# EAGLE board Sound_MP3-TF-16P_9x (EAGLE 9.5.2), part 1 of 2
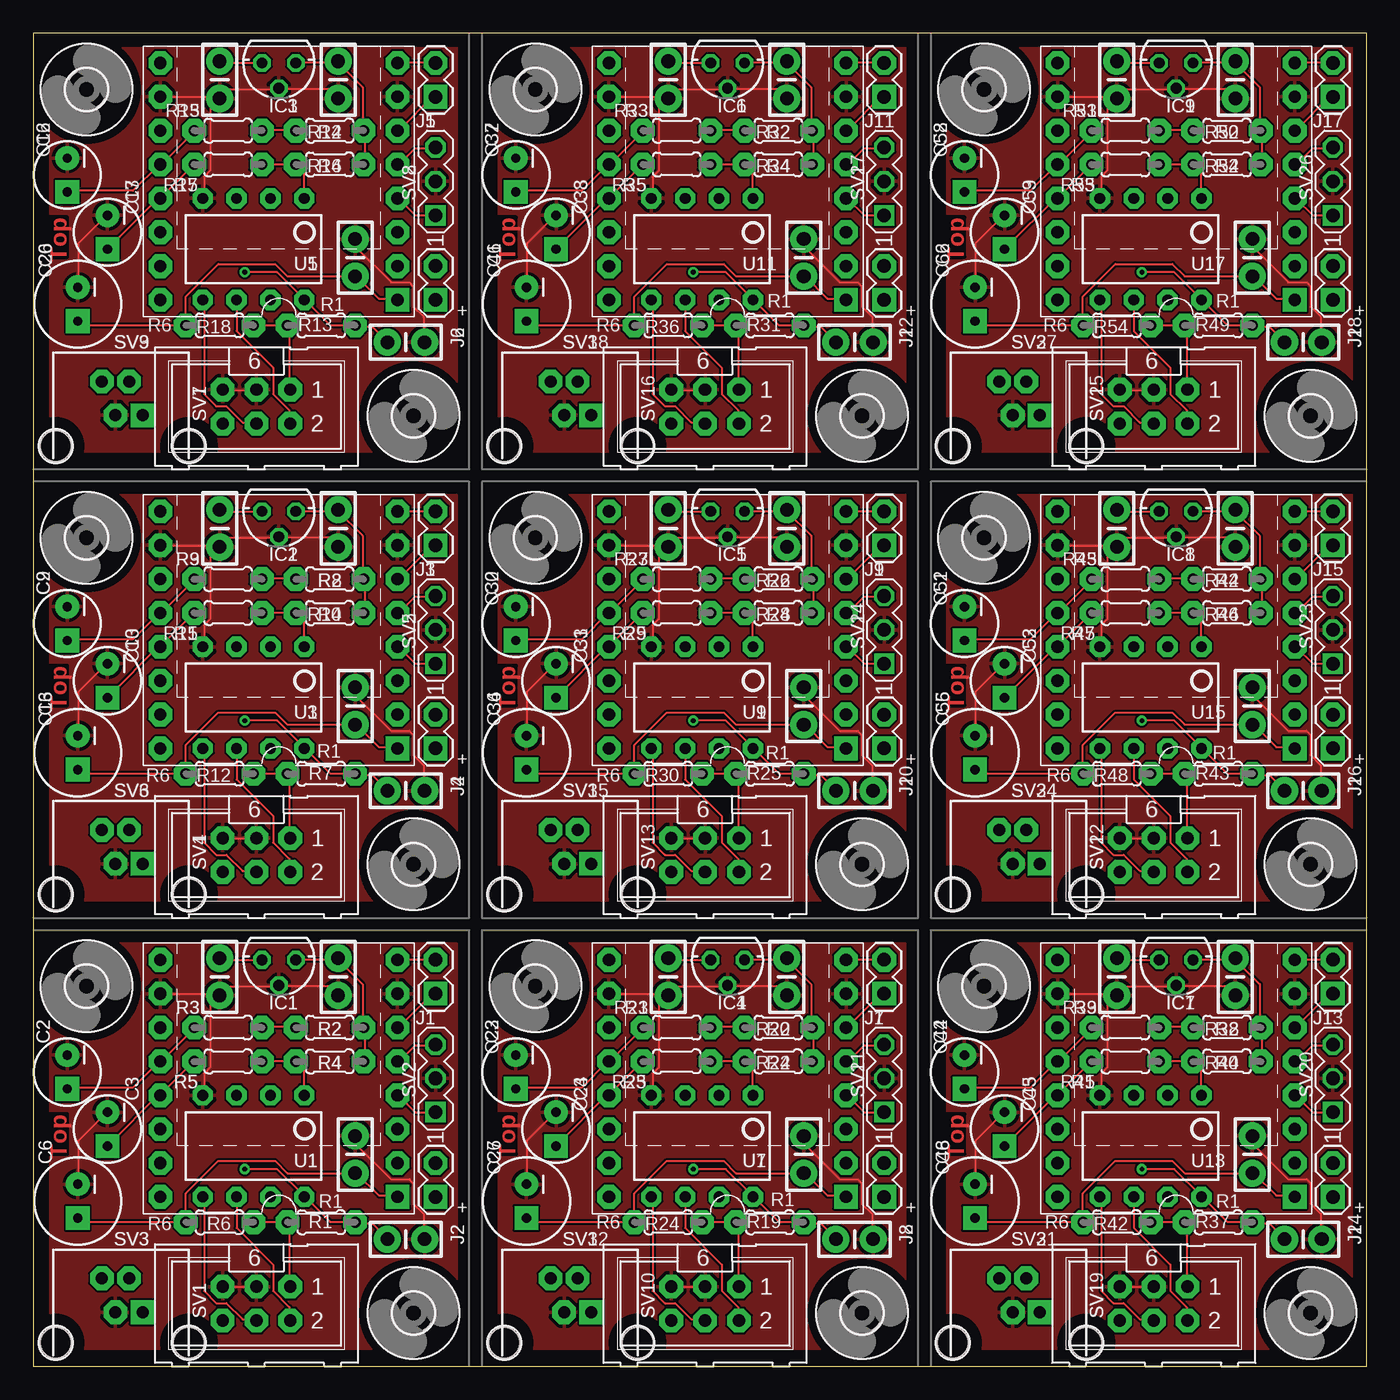
[diagram p0: board, top side]
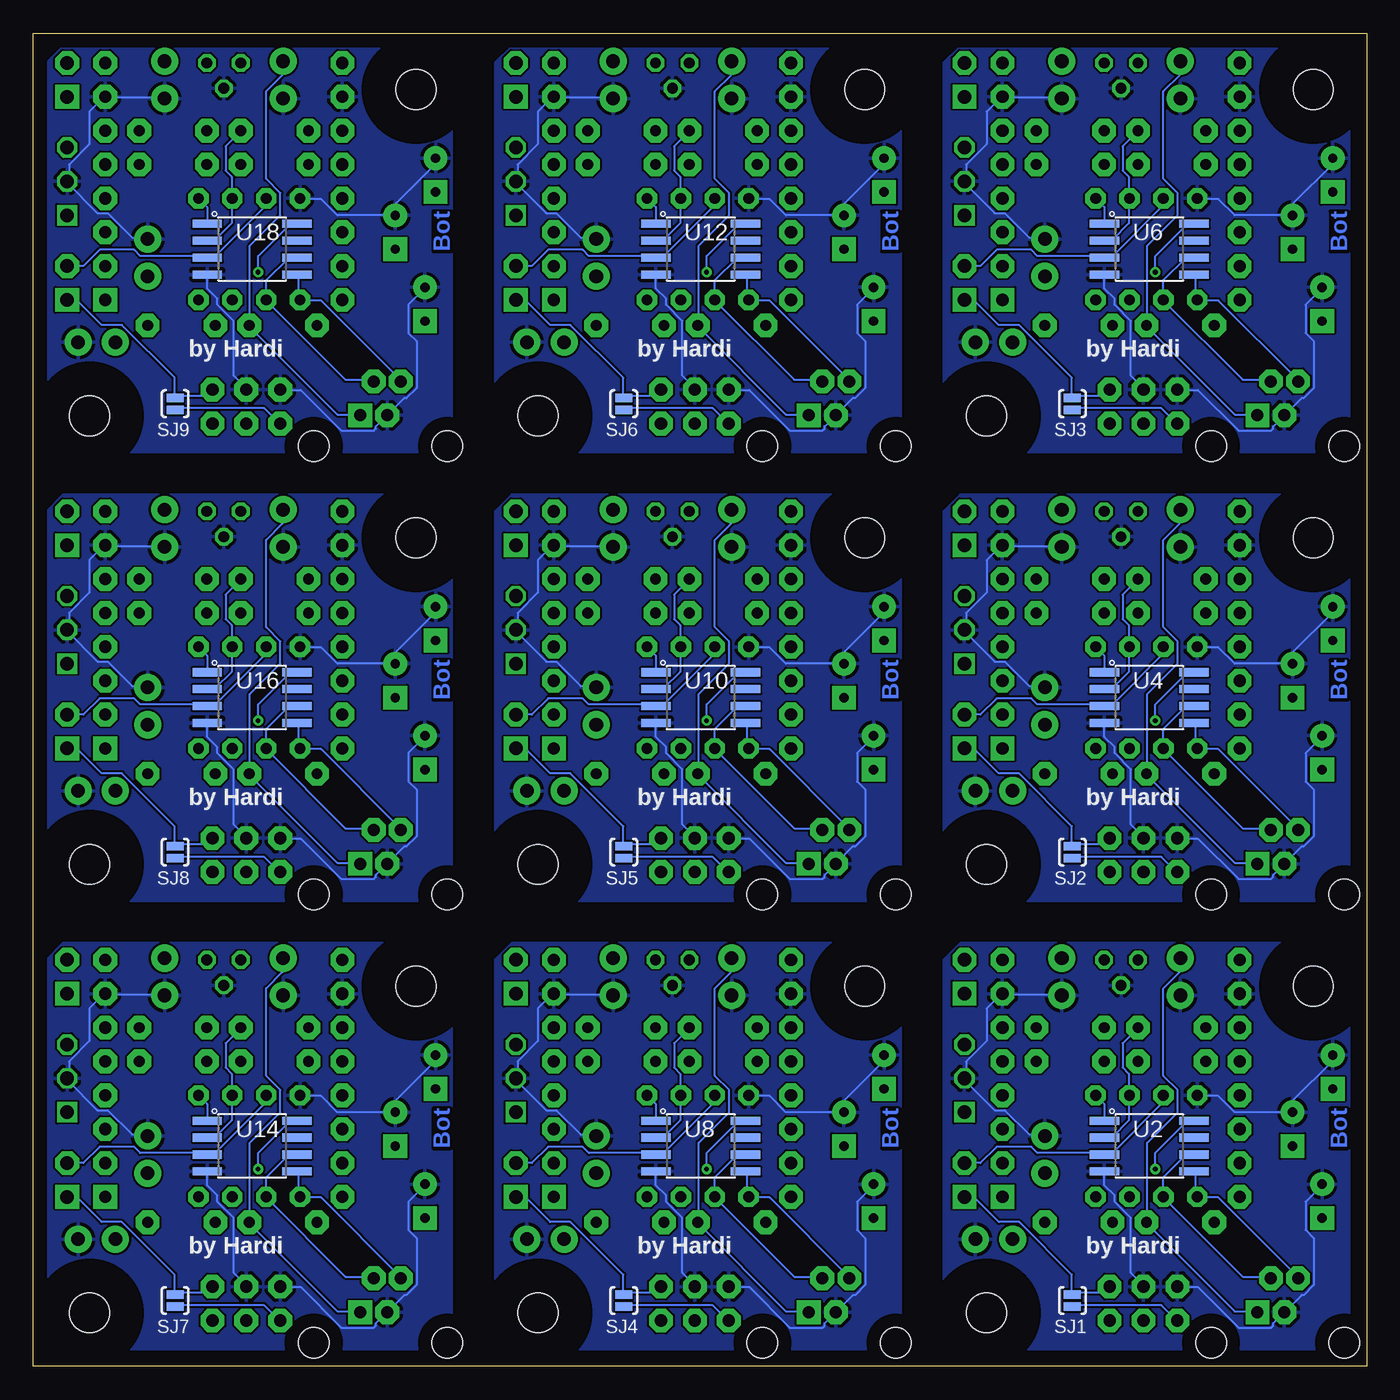
[diagram p1: board, bottom side, seen from below]

Size 99.98 x 99.98 mm. Coordinates in mm from the lower left corner, seen from the top.
Outline: 0,66.34 0,33.64
Outline: 33.64,0 66.34,0
Outline: 66.34,99.98 33.64,99.98
Outline: 99.98,33.64 99.98,66.34
Outline: 0,0 99.98,0 99.98,99.98 0,99.98 0,0
Copper layers (1*16): Top 0.035mm / dielectric 1.5mm / Bottom 0.035mm
Design rules "default": minimum track width 6mil, minimum drill 0.35mm, track to track 6mil, track to pad 6mil, pad to pad 6mil, via to via 6mil, smd to smd 6mil, copper to edge 40mil, drill to drill 6mil, minimum pad ring 10mil, minimum via ring 8mil, stop-mask expansion 4mil, vias tented up to drill 0mil, thermal gap 10mil

## Footprints (pad centres in the part's own frame; a part is rotated, then mirrored left to right if it is on the bottom)
CAP-PTH-SMALL-KIT = drill 1.016 pad 2.032: 1 -1.397,0; 2 1.397,0
CAPACITOR_CPOL-RADIAL-22UF = drill 0.7 pad 1.778 square: 1 1.27,0 | drill 0.7 pad 1.778: 2 -1.27,0
SPARKFUN-CAPACITORS_CPOL-RADIAL-100UF-25V = drill 0.7 pad 1.778 square: 1 1.27,0 | drill 0.7 pad 1.778: 2 -1.27,0
3,0 = hole 3: 0,0
78LXX = drill 0.813 octagon: GND 0,1.905; IN 1.27,0; OUT -1.27,0
1X02 = drill 1.016 pad 1.778 square: 1 0,0 | drill 1.016 pad 1.778 octagon: 2 2.54,0
MP3-TF-16P_MP3-TF-16P = drill 0.914 pad 1.778 square: 1 -8.89,16.51 | drill 0.914 pad 1.778 octagon: 2 -8.89,13.97; 3 -8.89,11.43; 4 -8.89,8.89; 5 -8.89,6.35; 6 -8.89,3.81; 7 -8.89,1.27; 8 -8.89,-1.27; 9 8.89,-1.27; 10 8.89,1.27; 11 8.89,3.81; 12 8.89,6.35; 13 8.89,8.89; 14 8.89,11.43; 15 8.89,13.97; 16 8.89,16.51
RCL_0204/5 = drill 0.813 pad 1.778 octagon: 1 -2.54,0; 2 2.54,0
SJ_2S-NO = smd 0.635 x 1.27: 1 -0.45,0; 2 0.45,0
ML6 = drill 0.914 pad 1.778 octagon: 1 -2.54,-1.27; 2 -2.54,1.27; 3 0,-1.27; 4 0,1.27; 5 2.54,-1.27; 6 2.54,1.27
MA03-1 = drill 1.016 pad 1.524 square: 1 -3.81,0 | drill 1.016 pad 1.524 octagon: 2 -1.27,0; 3 1.27,0
RJ10_NO_OVERLAP_BORDER = drill 0.9 pad 1.778 square: 1 -1.524,-2.3 | drill 0.9 pad 1.778 octagon: 2 -0.508,-4.84; 3 0.508,-2.3; 4 1.524,-4.84 | hole 2.3: 5,0; -5,0
S3PO_MODUL_WS2811_SOUND_MP3-TF-16P_WS2811_AND_ATTINY_WS2811_DIP08 = drill 0.813 pad 1.524 octagon: 1 -3.81,-3.81; 2 -1.27,-3.81; 3 1.27,-3.81; 4 3.81,-3.81; 5 3.81,3.81; 6 1.27,3.81; 7 -1.27,3.81; 8 -3.81,3.81
S3PO_MODUL_WS2811_SOUND_MP3-TF-16P_WS2811_AND_ATTINY_WS2811_SO08-EIAJ = smd 0.61 x 2.21: 1 -1.905,-3.378; 2 -0.635,-3.378; 3 0.635,-3.378; 4 1.905,-3.378; 5 1.905,3.353; 6 0.635,3.353; 7 -0.635,3.353; 8 -1.905,3.353

## Placement (x,y rotation side)
C1  100nF  [CAP-PTH-SMALL-KIT]  27.94,9.52 0 top
C2  22uF  [CAPACITOR_CPOL-RADIAL-22UF]  2.54,22.07 270 top
C3  22uF  [CAPACITOR_CPOL-RADIAL-22UF]  5.56,17.78 270 top
C4  100nF  [CAP-PTH-SMALL-KIT]  22.86,29.21 270 top
C5  100nF  [CAP-PTH-SMALL-KIT]  13.97,29.21 270 top
C6  470uF  [SPARKFUN-CAPACITORS_CPOL-RADIAL-100UF-25V]  3.33,12.38 270 top
C7  100nF  [CAP-PTH-SMALL-KIT]  24.13,15.88 90 top
C8  100nF  [CAP-PTH-SMALL-KIT]  27.94,43.17 0 top
C9  22uF  [CAPACITOR_CPOL-RADIAL-22UF]  2.54,55.71 270 top
C10  22uF  [CAPACITOR_CPOL-RADIAL-22UF]  5.56,51.42 270 top
C11  100nF  [CAP-PTH-SMALL-KIT]  22.86,62.85 270 top
C12  100nF  [CAP-PTH-SMALL-KIT]  13.97,62.85 270 top
C13  470uF  [SPARKFUN-CAPACITORS_CPOL-RADIAL-100UF-25V]  3.33,46.02 270 top
C14  100nF  [CAP-PTH-SMALL-KIT]  24.13,49.52 90 top
C15  100nF  [CAP-PTH-SMALL-KIT]  27.94,76.81 0 top
C16  22uF  [CAPACITOR_CPOL-RADIAL-22UF]  2.54,89.35 270 top
C17  22uF  [CAPACITOR_CPOL-RADIAL-22UF]  5.56,85.06 270 top
C18  100nF  [CAP-PTH-SMALL-KIT]  22.86,96.49 270 top
C19  100nF  [CAP-PTH-SMALL-KIT]  13.97,96.49 270 top
C20  470uF  [SPARKFUN-CAPACITORS_CPOL-RADIAL-100UF-25V]  3.33,79.67 270 top
C21  100nF  [CAP-PTH-SMALL-KIT]  24.13,83.16 90 top
C22  100nF  [CAP-PTH-SMALL-KIT]  61.58,9.52 0 top
C23  22uF  [CAPACITOR_CPOL-RADIAL-22UF]  36.18,22.07 270 top
C24  22uF  [CAPACITOR_CPOL-RADIAL-22UF]  39.2,17.78 270 top
C25  100nF  [CAP-PTH-SMALL-KIT]  56.5,29.21 270 top
C26  100nF  [CAP-PTH-SMALL-KIT]  47.61,29.21 270 top
C27  470uF  [SPARKFUN-CAPACITORS_CPOL-RADIAL-100UF-25V]  36.97,12.38 270 top
C28  100nF  [CAP-PTH-SMALL-KIT]  57.77,15.88 90 top
C29  100nF  [CAP-PTH-SMALL-KIT]  61.58,43.17 0 top
C30  22uF  [CAPACITOR_CPOL-RADIAL-22UF]  36.18,55.71 270 top
C31  22uF  [CAPACITOR_CPOL-RADIAL-22UF]  39.2,51.42 270 top
C32  100nF  [CAP-PTH-SMALL-KIT]  56.5,62.85 270 top
C33  100nF  [CAP-PTH-SMALL-KIT]  47.61,62.85 270 top
C34  470uF  [SPARKFUN-CAPACITORS_CPOL-RADIAL-100UF-25V]  36.97,46.02 270 top
C35  100nF  [CAP-PTH-SMALL-KIT]  57.77,49.52 90 top
C36  100nF  [CAP-PTH-SMALL-KIT]  61.58,76.81 0 top
C37  22uF  [CAPACITOR_CPOL-RADIAL-22UF]  36.18,89.35 270 top
C38  22uF  [CAPACITOR_CPOL-RADIAL-22UF]  39.2,85.06 270 top
C39  100nF  [CAP-PTH-SMALL-KIT]  56.5,96.49 270 top
C40  100nF  [CAP-PTH-SMALL-KIT]  47.61,96.49 270 top
C41  470uF  [SPARKFUN-CAPACITORS_CPOL-RADIAL-100UF-25V]  36.97,79.67 270 top
C42  100nF  [CAP-PTH-SMALL-KIT]  57.77,83.16 90 top
C43  100nF  [CAP-PTH-SMALL-KIT]  95.22,9.52 0 top
C44  22uF  [CAPACITOR_CPOL-RADIAL-22UF]  69.82,22.07 270 top
C45  22uF  [CAPACITOR_CPOL-RADIAL-22UF]  72.84,17.78 270 top
C46  100nF  [CAP-PTH-SMALL-KIT]  90.14,29.21 270 top
C47  100nF  [CAP-PTH-SMALL-KIT]  81.25,29.21 270 top
C48  470uF  [SPARKFUN-CAPACITORS_CPOL-RADIAL-100UF-25V]  70.61,12.38 270 top
C49  100nF  [CAP-PTH-SMALL-KIT]  91.41,15.88 90 top
C50  100nF  [CAP-PTH-SMALL-KIT]  95.22,43.17 0 top
C51  22uF  [CAPACITOR_CPOL-RADIAL-22UF]  69.82,55.71 270 top
C52  22uF  [CAPACITOR_CPOL-RADIAL-22UF]  72.84,51.42 270 top
C53  100nF  [CAP-PTH-SMALL-KIT]  90.14,62.85 270 top
C54  100nF  [CAP-PTH-SMALL-KIT]  81.25,62.85 270 top
C55  470uF  [SPARKFUN-CAPACITORS_CPOL-RADIAL-100UF-25V]  70.61,46.02 270 top
C56  100nF  [CAP-PTH-SMALL-KIT]  91.41,49.52 90 top
C57  100nF  [CAP-PTH-SMALL-KIT]  95.22,76.81 0 top
C58  22uF  [CAPACITOR_CPOL-RADIAL-22UF]  69.82,89.35 270 top
C59  22uF  [CAPACITOR_CPOL-RADIAL-22UF]  72.84,85.06 270 top
C60  100nF  [CAP-PTH-SMALL-KIT]  90.14,96.49 270 top
C61  100nF  [CAP-PTH-SMALL-KIT]  81.25,96.49 270 top
C62  470uF  [SPARKFUN-CAPACITORS_CPOL-RADIAL-100UF-25V]  70.61,79.67 270 top
C63  100nF  [CAP-PTH-SMALL-KIT]  91.41,83.16 90 top
H1  MOUNT-HOLE3.0  [3,0]  4,28.5 0 top
H2  MOUNT-HOLE3.0  [3,0]  4,62.14 0 top
H3  MOUNT-HOLE3.0  [3,0]  28.5,4 0 top
H4  MOUNT-HOLE3.0  [3,0]  28.5,37.64 0 top
H5  MOUNT-HOLE3.0  [3,0]  4,95.78 0 top
H6  MOUNT-HOLE3.0  [3,0]  28.5,71.28 0 top
H7  MOUNT-HOLE3.0  [3,0]  37.64,28.5 0 top
H8  MOUNT-HOLE3.0  [3,0]  62.14,4 0 top
H9  MOUNT-HOLE3.0  [3,0]  37.64,62.14 0 top
H10  MOUNT-HOLE3.0  [3,0]  62.14,37.64 0 top
H11  MOUNT-HOLE3.0  [3,0]  37.64,95.78 0 top
H12  MOUNT-HOLE3.0  [3,0]  62.14,71.28 0 top
H13  MOUNT-HOLE3.0  [3,0]  71.28,28.5 0 top
H14  MOUNT-HOLE3.0  [3,0]  95.78,4 0 top
H15  MOUNT-HOLE3.0  [3,0]  71.28,62.14 0 top
H16  MOUNT-HOLE3.0  [3,0]  95.78,37.64 0 top
H17  MOUNT-HOLE3.0  [3,0]  71.28,95.78 0 top
H18  MOUNT-HOLE3.0  [3,0]  95.78,71.28 0 top
IC1  LP 2950 ACZ3.3  [78LXX]  18.41,30.48 180 top
IC2  LP 2950 ACZ3.3  [78LXX]  18.41,64.12 180 top
IC3  LP 2950 ACZ3.3  [78LXX]  18.41,97.76 180 top
IC4  LP 2950 ACZ3.3  [78LXX]  52.05,30.48 180 top
IC5  LP 2950 ACZ3.3  [78LXX]  52.05,64.12 180 top
IC6  LP 2950 ACZ3.3  [78LXX]  52.05,97.76 180 top
IC7  LP 2950 ACZ3.3  [78LXX]  85.69,30.48 180 top
IC8  LP 2950 ACZ3.3  [78LXX]  85.69,64.12 180 top
IC9  LP 2950 ACZ3.3  [78LXX]  85.69,97.76 180 top
J1  Speaker  [1X02]  30.16,27.94 90 top
J2  LED  [1X02]  30.16,12.7 90 top
J3  Speaker  [1X02]  30.16,61.58 90 top
J4  LED  [1X02]  30.16,46.34 90 top
J5  Speaker  [1X02]  30.16,95.22 90 top
J6  LED  [1X02]  30.16,79.98 90 top
J7  Speaker  [1X02]  63.8,27.94 90 top
J8  LED  [1X02]  63.8,12.7 90 top
J9  Speaker  [1X02]  63.8,61.58 90 top
J10  LED  [1X02]  63.8,46.34 90 top
J11  Speaker  [1X02]  63.8,95.22 90 top
J12  LED  [1X02]  63.8,79.98 90 top
J13  Speaker  [1X02]  97.44,27.94 90 top
J14  LED  [1X02]  97.44,12.7 90 top
J15  Speaker  [1X02]  97.44,61.58 90 top
J16  LED  [1X02]  97.44,46.34 90 top
J17  Speaker  [1X02]  97.44,95.22 90 top
J18  LED  [1X02]  97.44,79.98 90 top
MOD1  Sound Modul  [MP3-TF-16P_MP3-TF-16P]  18.41,29.21 180 top
MOD2  Sound Modul  [MP3-TF-16P_MP3-TF-16P]  18.41,62.85 180 top
MOD3  Sound Modul  [MP3-TF-16P_MP3-TF-16P]  18.41,96.49 180 top
MOD4  Sound Modul  [MP3-TF-16P_MP3-TF-16P]  52.05,29.21 180 top
MOD5  Sound Modul  [MP3-TF-16P_MP3-TF-16P]  52.05,62.85 180 top
MOD6  Sound Modul  [MP3-TF-16P_MP3-TF-16P]  52.05,96.49 180 top
MOD7  Sound Modul  [MP3-TF-16P_MP3-TF-16P]  85.69,29.21 180 top
MOD8  Sound Modul  [MP3-TF-16P_MP3-TF-16P]  85.69,62.85 180 top
MOD9  Sound Modul  [MP3-TF-16P_MP3-TF-16P]  85.69,96.49 180 top
R1  150  [RCL_0204/5]  21.59,10.8 180 top
R2  1K5 1%  [RCL_0204/5]  22.23,25.4 180 top
R3  33  [RCL_0204/5]  14.61,25.4 180 top
R4  1K5 1%  [RCL_0204/5]  22.23,22.86 180 top
R5  33  [RCL_0204/5]  14.61,22.86 180 top
R6  1 R  [RCL_0204/5]  13.97,10.8 180 top
R7  150  [RCL_0204/5]  21.59,44.44 180 top
R8  1K5 1%  [RCL_0204/5]  22.23,59.04 180 top
R9  33  [RCL_0204/5]  14.61,59.04 180 top
R10  1K5 1%  [RCL_0204/5]  22.23,56.5 180 top
R11  33  [RCL_0204/5]  14.61,56.5 180 top
R12  1 R  [RCL_0204/5]  13.97,44.44 180 top
R13  150  [RCL_0204/5]  21.59,78.08 180 top
R14  1K5 1%  [RCL_0204/5]  22.23,92.68 180 top
R15  33  [RCL_0204/5]  14.61,92.68 180 top
R16  1K5 1%  [RCL_0204/5]  22.23,90.14 180 top
R17  33  [RCL_0204/5]  14.61,90.14 180 top
R18  1 R  [RCL_0204/5]  13.97,78.08 180 top
R19  150  [RCL_0204/5]  55.23,10.8 180 top
R20  1K5 1%  [RCL_0204/5]  55.86,25.4 180 top
R21  33  [RCL_0204/5]  48.24,25.4 180 top
R22  1K5 1%  [RCL_0204/5]  55.86,22.86 180 top
R23  33  [RCL_0204/5]  48.24,22.86 180 top
R24  1 R  [RCL_0204/5]  47.61,10.8 180 top
R25  150  [RCL_0204/5]  55.23,44.44 180 top
R26  1K5 1%  [RCL_0204/5]  55.86,59.04 180 top
R27  33  [RCL_0204/5]  48.24,59.04 180 top
R28  1K5 1%  [RCL_0204/5]  55.86,56.5 180 top
R29  33  [RCL_0204/5]  48.24,56.5 180 top
R30  1 R  [RCL_0204/5]  47.61,44.44 180 top
R31  150  [RCL_0204/5]  55.23,78.08 180 top
R32  1K5 1%  [RCL_0204/5]  55.86,92.68 180 top
R33  33  [RCL_0204/5]  48.24,92.68 180 top
R34  1K5 1%  [RCL_0204/5]  55.86,90.14 180 top
R35  33  [RCL_0204/5]  48.24,90.14 180 top
R36  1 R  [RCL_0204/5]  47.61,78.08 180 top
R37  150  [RCL_0204/5]  88.87,10.8 180 top
R38  1K5 1%  [RCL_0204/5]  89.5,25.4 180 top
R39  33  [RCL_0204/5]  81.88,25.4 180 top
R40  1K5 1%  [RCL_0204/5]  89.5,22.86 180 top
R41  33  [RCL_0204/5]  81.88,22.86 180 top
R42  1 R  [RCL_0204/5]  81.25,10.8 180 top
R43  150  [RCL_0204/5]  88.87,44.44 180 top
R44  1K5 1%  [RCL_0204/5]  89.5,59.04 180 top
R45  33  [RCL_0204/5]  81.88,59.04 180 top
R46  1K5 1%  [RCL_0204/5]  89.5,56.5 180 top
R47  33  [RCL_0204/5]  81.88,56.5 180 top
R48  1 R  [RCL_0204/5]  81.25,44.44 180 top
R49  150  [RCL_0204/5]  88.87,78.08 180 top
R50  1K5 1%  [RCL_0204/5]  89.5,92.68 180 top
R51  33  [RCL_0204/5]  81.88,92.68 180 top
R52  1K5 1%  [RCL_0204/5]  89.5,90.14 180 top
R53  33  [RCL_0204/5]  81.88,90.14 180 top
R54  1 R  [RCL_0204/5]  81.25,78.08 180 top
SJ1  Pin6 = 5V  [SJ_2S-NO]  22.07,4.92 270 bottom
SJ2  Pin6 = 5V  [SJ_2S-NO]  22.07,38.56 270 bottom
SJ3  Pin6 = 5V  [SJ_2S-NO]  22.07,72.2 270 bottom
SJ4  Pin6 = 5V  [SJ_2S-NO]  55.71,4.92 270 bottom
SJ5  Pin6 = 5V  [SJ_2S-NO]  55.71,38.56 270 bottom
SJ6  Pin6 = 5V  [SJ_2S-NO]  55.71,72.2 270 bottom
SJ7  Pin6 = 5V  [SJ_2S-NO]  89.35,4.92 270 bottom
SJ8  Pin6 = 5V  [SJ_2S-NO]  89.35,38.56 270 bottom
SJ9  Pin6 = 5V  [SJ_2S-NO]  89.35,72.2 270 bottom
SV1  [ML6]  16.73,4.7 180 top
SV2  Aux Out  [MA03-1]  30.16,22.86 90 top
SV3  RJ10RJ10_WO_OVERLAP  [RJ10_NO_OVERLAP_BORDER]  6.67,1.75 180 top
SV4  [ML6]  16.73,38.34 180 top
SV5  Aux Out  [MA03-1]  30.16,56.5 90 top
SV6  RJ10RJ10_WO_OVERLAP  [RJ10_NO_OVERLAP_BORDER]  6.67,35.39 180 top
SV7  [ML6]  16.73,71.98 180 top
SV8  Aux Out  [MA03-1]  30.16,90.14 90 top
SV9  RJ10RJ10_WO_OVERLAP  [RJ10_NO_OVERLAP_BORDER]  6.67,69.03 180 top
SV10  [ML6]  50.37,4.7 180 top
SV11  Aux Out  [MA03-1]  63.8,22.86 90 top
SV12  RJ10RJ10_WO_OVERLAP  [RJ10_NO_OVERLAP_BORDER]  40.31,1.75 180 top
SV13  [ML6]  50.37,38.34 180 top
SV14  Aux Out  [MA03-1]  63.8,56.5 90 top
SV15  RJ10RJ10_WO_OVERLAP  [RJ10_NO_OVERLAP_BORDER]  40.31,35.39 180 top
SV16  [ML6]  50.37,71.98 180 top
SV17  Aux Out  [MA03-1]  63.8,90.14 90 top
SV18  RJ10RJ10_WO_OVERLAP  [RJ10_NO_OVERLAP_BORDER]  40.31,69.03 180 top
SV19  [ML6]  84.01,4.7 180 top
SV20  Aux Out  [MA03-1]  97.44,22.86 90 top
SV21  RJ10RJ10_WO_OVERLAP  [RJ10_NO_OVERLAP_BORDER]  73.95,1.75 180 top
SV22  [ML6]  84.01,38.34 180 top
SV23  Aux Out  [MA03-1]  97.44,56.5 90 top
SV24  RJ10RJ10_WO_OVERLAP  [RJ10_NO_OVERLAP_BORDER]  73.95,35.39 180 top
SV25  [ML6]  84.01,71.98 180 top
SV26  Aux Out  [MA03-1]  97.44,90.14 90 top
SV27  RJ10RJ10_WO_OVERLAP  [RJ10_NO_OVERLAP_BORDER]  73.95,69.03 180 top
U1  WS2811-DIP  [S3PO_MODUL_WS2811_SOUND_MP3-TF-16P_WS2811_AND_ATTINY_WS2811_DIP08]  16.51,16.51 180 top
U2  WS2811-SMD  [S3PO_MODUL_WS2811_SOUND_MP3-TF-16P_WS2811_AND_ATTINY_WS2811_SO08-EIAJ]  16.28,16.51 270 bottom
U3  WS2811-DIP  [S3PO_MODUL_WS2811_SOUND_MP3-TF-16P_WS2811_AND_ATTINY_WS2811_DIP08]  16.51,50.15 180 top
U4  WS2811-SMD  [S3PO_MODUL_WS2811_SOUND_MP3-TF-16P_WS2811_AND_ATTINY_WS2811_SO08-EIAJ]  16.28,50.15 270 bottom
U5  WS2811-DIP  [S3PO_MODUL_WS2811_SOUND_MP3-TF-16P_WS2811_AND_ATTINY_WS2811_DIP08]  16.51,83.79 180 top
U6  WS2811-SMD  [S3PO_MODUL_WS2811_SOUND_MP3-TF-16P_WS2811_AND_ATTINY_WS2811_SO08-EIAJ]  16.28,83.79 270 bottom
U7  WS2811-DIP  [S3PO_MODUL_WS2811_SOUND_MP3-TF-16P_WS2811_AND_ATTINY_WS2811_DIP08]  50.15,16.51 180 top
U8  WS2811-SMD  [S3PO_MODUL_WS2811_SOUND_MP3-TF-16P_WS2811_AND_ATTINY_WS2811_SO08-EIAJ]  49.92,16.51 270 bottom
U9  WS2811-DIP  [S3PO_MODUL_WS2811_SOUND_MP3-TF-16P_WS2811_AND_ATTINY_WS2811_DIP08]  50.15,50.15 180 top
U10  WS2811-SMD  [S3PO_MODUL_WS2811_SOUND_MP3-TF-16P_WS2811_AND_ATTINY_WS2811_SO08-EIAJ]  49.92,50.15 270 bottom
U11  WS2811-DIP  [S3PO_MODUL_WS2811_SOUND_MP3-TF-16P_WS2811_AND_ATTINY_WS2811_DIP08]  50.15,83.79 180 top
U12  WS2811-SMD  [S3PO_MODUL_WS2811_SOUND_MP3-TF-16P_WS2811_AND_ATTINY_WS2811_SO08-EIAJ]  49.92,83.79 270 bottom
U13  WS2811-DIP  [S3PO_MODUL_WS2811_SOUND_MP3-TF-16P_WS2811_AND_ATTINY_WS2811_DIP08]  83.79,16.51 180 top
U14  WS2811-SMD  [S3PO_MODUL_WS2811_SOUND_MP3-TF-16P_WS2811_AND_ATTINY_WS2811_SO08-EIAJ]  83.56,16.51 270 bottom
U15  WS2811-DIP  [S3PO_MODUL_WS2811_SOUND_MP3-TF-16P_WS2811_AND_ATTINY_WS2811_DIP08]  83.79,50.15 180 top
U16  WS2811-SMD  [S3PO_MODUL_WS2811_SOUND_MP3-TF-16P_WS2811_AND_ATTINY_WS2811_SO08-EIAJ]  83.56,50.15 270 bottom
U17  WS2811-DIP  [S3PO_MODUL_WS2811_SOUND_MP3-TF-16P_WS2811_AND_ATTINY_WS2811_DIP08]  83.79,83.79 180 top
U18  WS2811-SMD  [S3PO_MODUL_WS2811_SOUND_MP3-TF-16P_WS2811_AND_ATTINY_WS2811_SO08-EIAJ]  83.56,83.79 270 bottom

## Library data of the parts
C1 C4 C5 C7 C8 C11 C12 C14 C15 C18 C19 C21 C22 C25 C26 C28 C29 C32 C33 C35 C36 C39 C40 C42 C43 C46 C47 C49 C50 C53 C54 C56 C57 C60 C61 C63 = SparkFun-Capacitors; PROD_ID: CAP-08370
C2 C3 C9 C10 C16 C17 C23 C24 C30 C31 C37 C38 C44 C45 C51 C52 C58 C59 = Sound_MP3-TF-16P_WS2811_and_ATTiny; PROD_ID: CAP-08439
C6 C13 C20 C27 C34 C41 C48 C55 C62 = Sound_MP3-TF-16P_and_WS2811; PROD_ID: CAP-08439
H1-H18 = holes
IC1-IC9 = v-reg-3
J1-J18 = SparkFun-Connectors
MOD1-MOD9 = Sound_MP3-TF-16P_WS2811_and_ATTiny; OC_FARNELL: unknown; OC_NEWARK: unknown
R1-R54 = Sound_MP3-TF-16P_and_WS2811; SPICEPREFIX: R
SJ1-SJ9 = SparkFun-Retired
SV1 SV4 SV7 SV10 SV13 SV16 SV19 SV22 SV25 = con-harting-ml; OC_FARNELL: unknown; OC_NEWARK: unknown
SV2 SV5 SV8 SV11 SV14 SV17 SV20 SV23 SV26 = con-lstb
SV3 SV6 SV9 SV12 SV15 SV18 SV21 SV24 SV27 = RJ10
U1 U3 U5 U7 U9 U11 U13 U15 U17 = S3PO_Modul_WS2811; PROD_ID: IC-09439
U2 U4 U6 U8 U10 U12 U14 U16 U18 = S3PO_Modul_WS2811; PROD_ID: IC-08922; VALUE: Tiny45-20-SMT

## Nets
3V1: C11.1 IC2.OUT R8.1 R10.1
3V2: C18.1 IC3.OUT R14.1 R16.1
3V3: C4.1 IC1.OUT R2.1 R4.1
3V4: C25.1 IC4.OUT R20.1 R22.1
3V5: C32.1 IC5.OUT R26.1 R28.1
3V6: C39.1 IC6.OUT R32.1 R34.1
3V7: C46.1 IC7.OUT R38.1 R40.1
3V8: C53.1 IC8.OUT R44.1 R46.1
3V9: C60.1 IC9.OUT R50.1 R52.1
+5V: C5.1 IC1.IN J2.1 R1.2 R6.1 SJ1.1 SV1.1 SV3.1
+5V1: SJ1.2 SV1.6
+5V2: C12.1 IC2.IN J4.1 R7.2 R12.1 SJ2.1 SV4.1 SV6.1
+5V3: SJ2.2 SV4.6
+5V4: C19.1 IC3.IN J6.1 R13.2 R18.1 SJ3.1 SV7.1 SV9.1
+5V5: SJ3.2 SV7.6
+5V6: C26.1 IC4.IN J8.1 R19.2 R24.1 SJ4.1 SV10.1 SV12.1
+5V7: SJ4.2 SV10.6
+5V8: C33.1 IC5.IN J10.1 R25.2 R30.1 SJ5.1 SV13.1 SV15.1
+5V9: SJ5.2 SV13.6
+5V10: C40.1 IC6.IN J12.1 R31.2 R36.1 SJ6.1 SV16.1 SV18.1
+5V11: SJ6.2 SV16.6
+5V12: C47.1 IC7.IN J14.1 R37.2 R42.1 SJ7.1 SV19.1 SV21.1
+5V13: SJ7.2 SV19.6
+5V14: C54.1 IC8.IN J16.1 R43.2 R48.1 SJ8.1 SV22.1 SV24.1
+5V15: SJ8.2 SV22.6
+5V16: C61.1 IC9.IN J18.1 R49.2 R54.1 SJ9.1 SV25.1 SV27.1
+5V17: SJ9.2 SV25.6
G1: R4.2 R5.1 U1.1 U2.1
G2: R10.2 R11.1 U3.1 U4.1
G3: R16.2 R17.1 U5.1 U6.1
G4: R22.2 R23.1 U7.1 U8.1
G5: R28.2 R29.1 U9.1 U10.1
G6: R34.2 R35.1 U11.1 U12.1
G7: R40.2 R41.1 U13.1 U14.1
G8: R46.2 R47.1 U15.1 U16.1
G9: R52.2 R53.1 U17.1 U18.1
GND: C1.2 C2.2 C3.2 C4.2 C5.2 C6.2 C7.2 IC1.GND MOD1.7 MOD1.10 SV1.3 SV1.5 SV2.2 SV3.3 U1.4 U2.4
GND1: C8.2 C9.2 C10.2 C11.2 C12.2 C13.2 C14.2 IC2.GND MOD2.7 MOD2.10 SV4.3 SV4.5 SV5.2 SV6.3 U3.4 U4.4
GND2: C15.2 C16.2 C17.2 C18.2 C19.2 C20.2 C21.2 IC3.GND MOD3.7 MOD3.10 SV7.3 SV7.5 SV8.2 SV9.3 U5.4 U6.4
GND3: C22.2 C23.2 C24.2 C25.2 C26.2 C27.2 C28.2 IC4.GND MOD4.7 MOD4.10 SV10.3 SV10.5 SV11.2 SV12.3 U7.4 U8.4
GND4: C29.2 C30.2 C31.2 C32.2 C33.2 C34.2 C35.2 IC5.GND MOD5.7 MOD5.10 SV13.3 SV13.5 SV14.2 SV15.3 U9.4 U10.4
GND5: C36.2 C37.2 C38.2 C39.2 C40.2 C41.2 C42.2 IC6.GND MOD6.7 MOD6.10 SV16.3 SV16.5 SV17.2 SV18.3 U11.4 U12.4
GND6: C43.2 C44.2 C45.2 C46.2 C47.2 C48.2 C49.2 IC7.GND MOD7.7 MOD7.10 SV19.3 SV19.5 SV20.2 SV21.3 U13.4 U14.4
GND7: C50.2 C51.2 C52.2 C53.2 C54.2 C55.2 C56.2 IC8.GND MOD8.7 MOD8.10 SV22.3 SV22.5 SV23.2 SV24.3 U15.4 U16.4
GND8: C57.2 C58.2 C59.2 C60.2 C61.2 C62.2 C63.2 IC9.GND MOD9.7 MOD9.10 SV25.3 SV25.5 SV26.2 SV27.3 U17.4 U18.4
N$1: MOD1.5 SV2.3
N$2: MOD1.4 SV2.1
N$3: SV1.2 SV3.2 U1.6 U2.6
N$4: SV1.4 SV3.4 U1.5 U2.5
N$5: J1.1 MOD1.6
N$6: J1.2 MOD1.8
N$7: C2.1 MOD1.12 R3.2
N$8: C3.1 MOD1.13 R5.2
N$9: C6.1 C7.1 MOD1.1 R6.2
N$10: J2.2 U1.3 U2.3
N$11: C13.1 C14.1 MOD2.1 R12.2
N$12: C9.1 MOD2.12 R9.2
N$13: C10.1 MOD2.13 R11.2
N$14: SV4.2 SV6.2 U3.6 U4.6
N$15: SV4.4 SV6.4 U3.5 U4.5
N$16: MOD2.5 SV5.3
N$17: MOD2.4 SV5.1
N$18: J3.1 MOD2.6
N$19: J3.2 MOD2.8
N$20: J4.2 U3.3 U4.3
N$21: C20.1 C21.1 MOD3.1 R18.2
N$22: C16.1 MOD3.12 R15.2
N$23: C17.1 MOD3.13 R17.2
N$24: SV7.2 SV9.2 U5.6 U6.6
N$25: SV7.4 SV9.4 U5.5 U6.5
N$26: MOD3.5 SV8.3
N$27: MOD3.4 SV8.1
N$28: J5.1 MOD3.6
N$29: J5.2 MOD3.8
N$30: J6.2 U5.3 U6.3
N$31: C27.1 C28.1 MOD4.1 R24.2
N$32: C23.1 MOD4.12 R21.2
N$33: C24.1 MOD4.13 R23.2
N$34: SV10.2 SV12.2 U7.6 U8.6
N$35: SV10.4 SV12.4 U7.5 U8.5
N$36: MOD4.5 SV11.3
N$37: MOD4.4 SV11.1
N$38: J7.1 MOD4.6
N$39: J7.2 MOD4.8
N$40: J8.2 U7.3 U8.3
N$41: C34.1 C35.1 MOD5.1 R30.2
N$42: C30.1 MOD5.12 R27.2
N$43: C31.1 MOD5.13 R29.2
N$44: SV13.2 SV15.2 U9.6 U10.6
N$45: SV13.4 SV15.4 U9.5 U10.5
N$46: MOD5.5 SV14.3
N$47: MOD5.4 SV14.1
N$48: J9.1 MOD5.6
N$49: J9.2 MOD5.8
N$50: J10.2 U9.3 U10.3
N$51: C41.1 C42.1 MOD6.1 R36.2
N$52: C37.1 MOD6.12 R33.2
N$53: C38.1 MOD6.13 R35.2
N$54: SV16.2 SV18.2 U11.6 U12.6
N$55: SV16.4 SV18.4 U11.5 U12.5
N$56: MOD6.5 SV17.3
N$57: MOD6.4 SV17.1
N$58: J11.1 MOD6.6
N$59: J11.2 MOD6.8
N$60: J12.2 U11.3 U12.3
N$61: C48.1 C49.1 MOD7.1 R42.2
N$62: C44.1 MOD7.12 R39.2
N$63: C45.1 MOD7.13 R41.2
N$64: SV19.2 SV21.2 U13.6 U14.6
N$65: SV19.4 SV21.4 U13.5 U14.5
N$66: MOD7.5 SV20.3
N$67: MOD7.4 SV20.1
N$68: J13.1 MOD7.6
N$69: J13.2 MOD7.8
N$70: J14.2 U13.3 U14.3
N$71: C55.1 C56.1 MOD8.1 R48.2
N$72: C51.1 MOD8.12 R45.2
N$73: C52.1 MOD8.13 R47.2
N$74: SV22.2 SV24.2 U15.6 U16.6
N$75: SV22.4 SV24.4 U15.5 U16.5
N$76: MOD8.5 SV23.3
N$77: MOD8.4 SV23.1
N$78: J15.1 MOD8.6
N$79: J15.2 MOD8.8
N$80: J16.2 U15.3 U16.3
N$81: C62.1 C63.1 MOD9.1 R54.2
N$82: C58.1 MOD9.12 R51.2
N$83: C59.1 MOD9.13 R53.2
N$84: SV25.2 SV27.2 U17.6 U18.6
N$85: SV25.4 SV27.4 U17.5 U18.5
N$86: MOD9.5 SV26.3
N$87: MOD9.4 SV26.1
N$88: J17.1 MOD9.6
N$89: J17.2 MOD9.8
N$90: J18.2 U17.3 U18.3
PWR1: C1.1 R1.1 U1.8 U2.8
PWR2: C8.1 R7.1 U3.8 U4.8
PWR3: C15.1 R13.1 U5.8 U6.8
PWR4: C22.1 R19.1 U7.8 U8.8
PWR5: C29.1 R25.1 U9.8 U10.8
PWR6: C36.1 R31.1 U11.8 U12.8
PWR7: C43.1 R37.1 U13.8 U14.8
PWR8: C50.1 R43.1 U15.8 U16.8
PWR9: C57.1 R49.1 U17.8 U18.8
R1: R2.2 R3.1 U1.2 U2.2
R2: R8.2 R9.1 U3.2 U4.2
R3: R14.2 R15.1 U5.2 U6.2
R4: R20.2 R21.1 U7.2 U8.2
R5: R26.2 R27.1 U9.2 U10.2
R6: R32.2 R33.1 U11.2 U12.2
R7: R38.2 R39.1 U13.2 U14.2
R8: R44.2 R45.1 U15.2 U16.2
R9: R50.2 R51.1 U17.2 U18.2